# Altium PCB DRIVER.PcbDoc
Units mm, origin at the board's own origin, x right, y up, seen from the top; angles counter-clockwise.
Board outline 50 x 50 mm, 2 copper layers (Top Layer, Bottom Layer); 85 components, 68 nets, 234 pads, 32 vias.
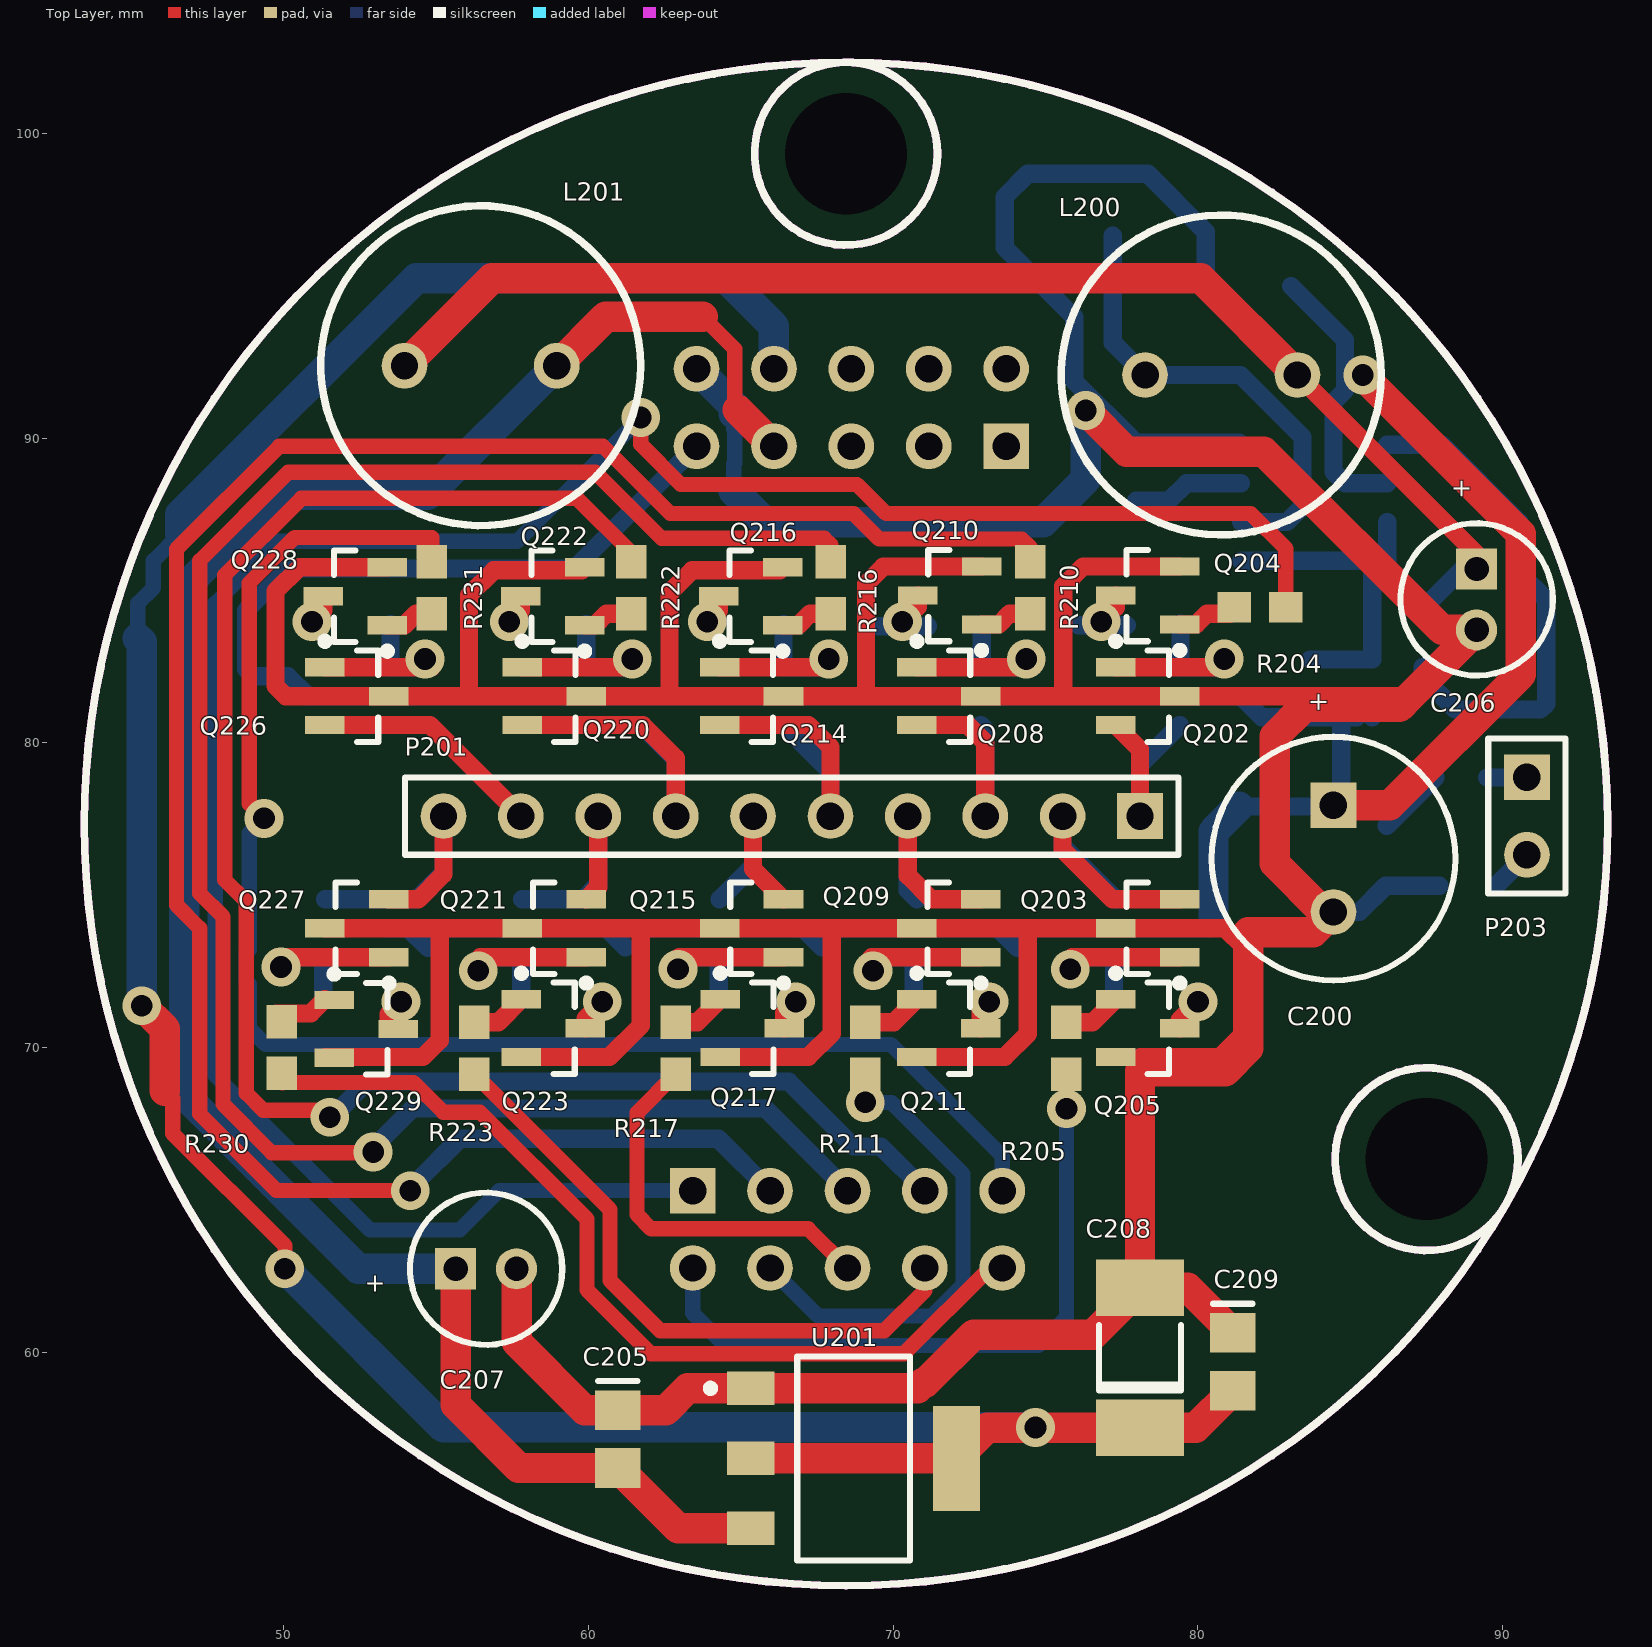
[diagram p0: Top Layer view]
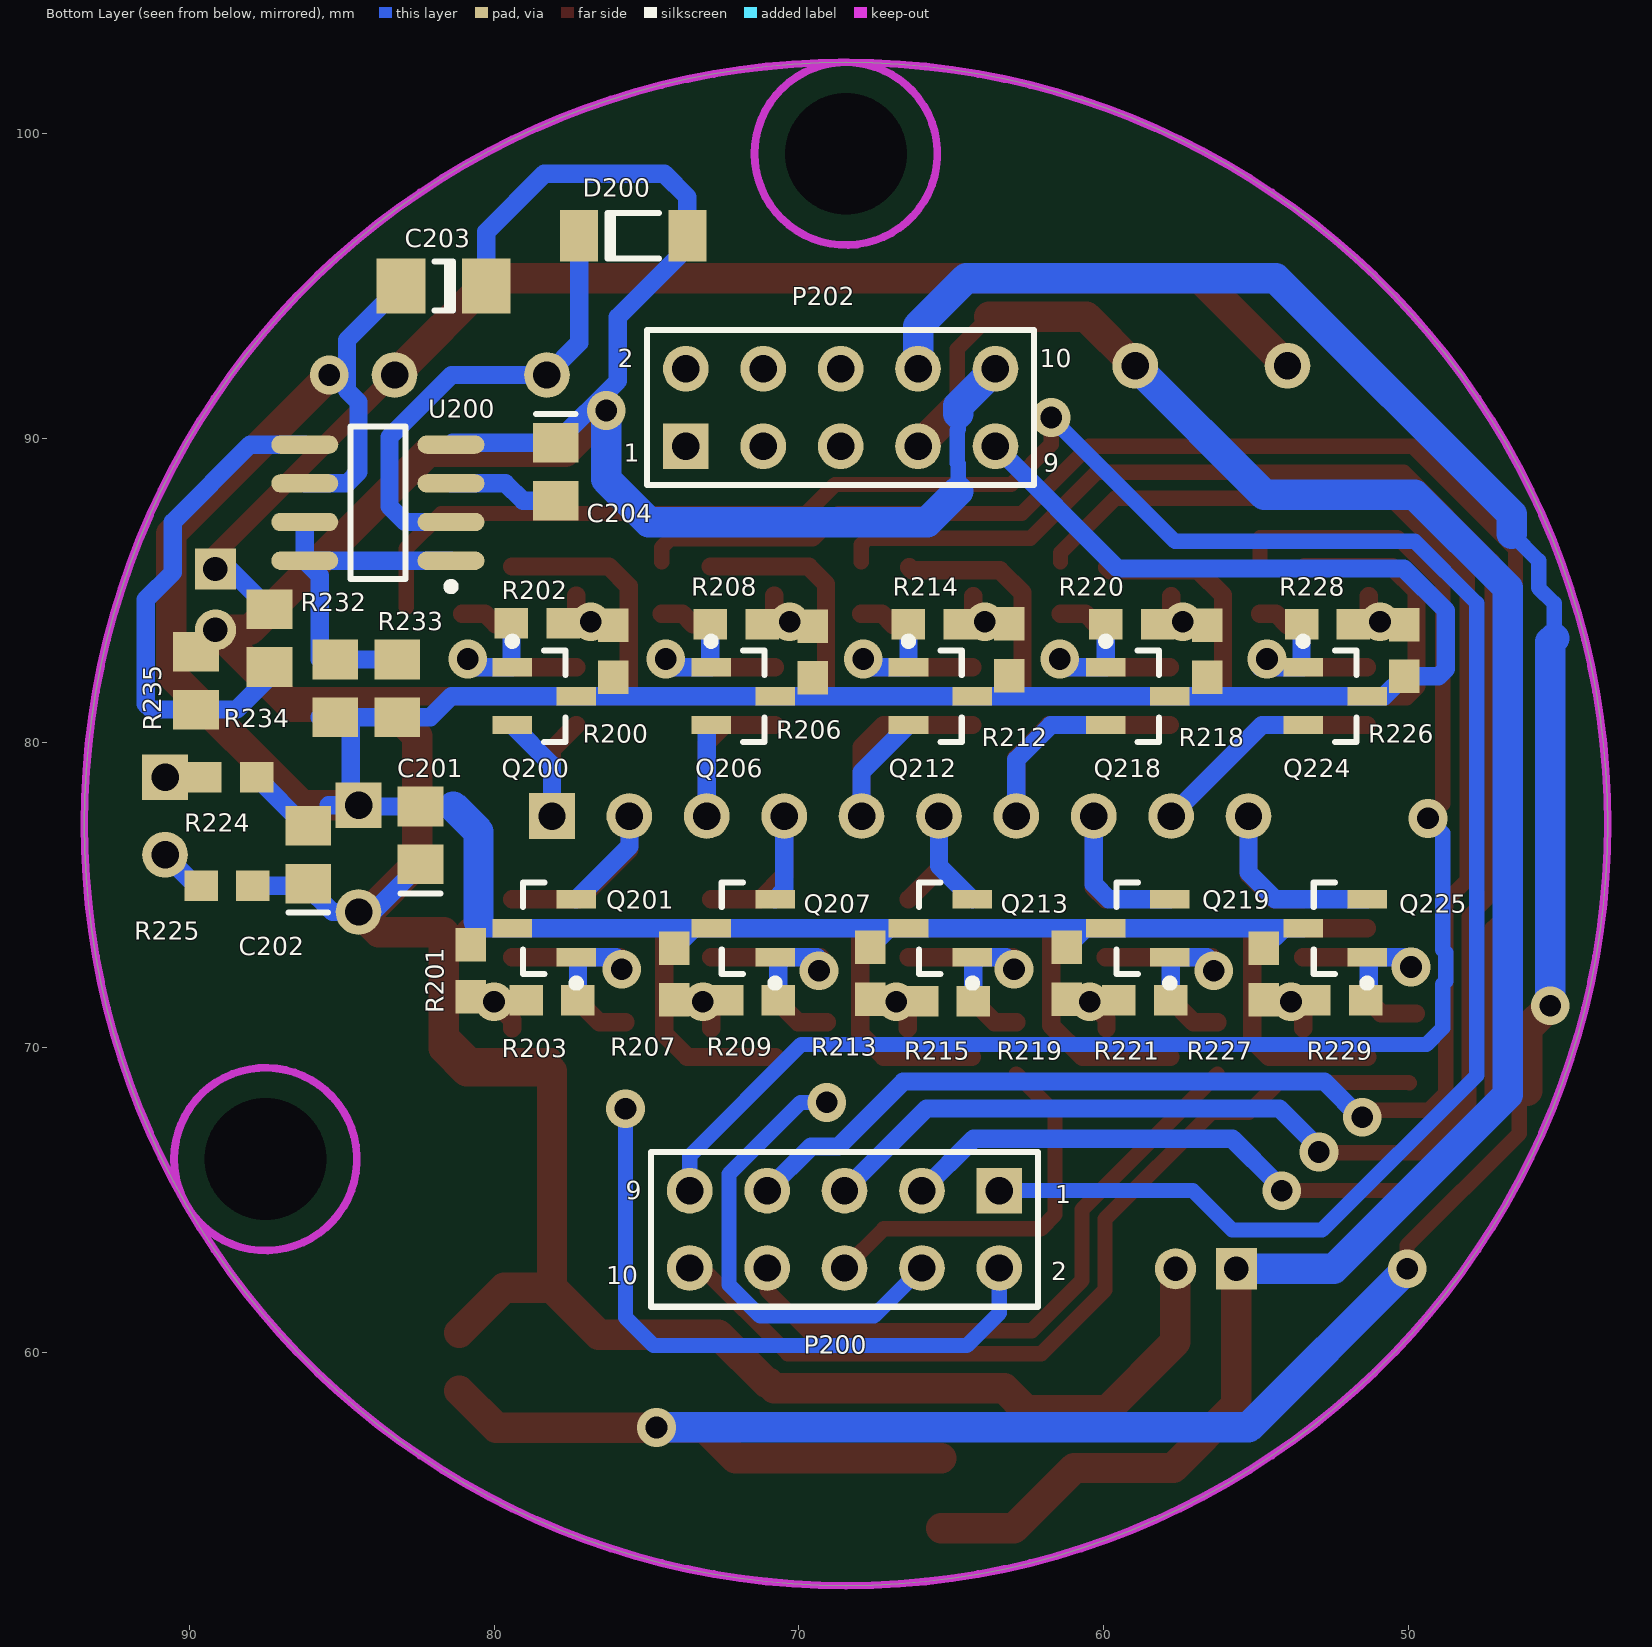
[diagram p1: Bottom Layer view, seen from below]

## Layer stack, top to bottom
Top Solder: solder mask 0.0102, Solder Resist, Dk 3.5
Top Layer: signal copper 0.0356
Dielectric 1: dielectric 0.32, FR-4, Dk 4.8
Bottom Layer: signal copper 0.0356
Bottom Solder: solder mask 0.0102, Solder Resist, Dk 3.5

## Board outline
68.456,52.337 cw(c68.456,77.337) 43.456,77.337 cw(c68.456,77.337) 68.456,102.337 cw(c68.456,77.337) 93.456,77.337 cw(c68.456,77.337)

## Design rules (kind name [scope] priority, off if disabled: settings)
Clearance [All] p1: gap=0.254 ignorepadtopadclearanceinfootprint=FALSE except(0: Arc-Hole Track-Hole SMDPad-Hole THPad-Hole Via-Hole Fill-Hole Poly-Hole Region-Hole Text-Hole)
PolygonConnect [All] p1: connectstyle=Relief reliefconductorwidth=0.254 reliefentries=4 polygonreliefangle="90 Angle" airgapwidth=0.254
RoutingVias [All] p1: holewidth=0.711 width=1.27 viastyle="Through Hole" minholewidth=0.711 minwidth=1.27 maxholewidth=0.711 maxwidth=1.27
SolderMaskExpansion [All] p1: expansion=0.102
Width [All] p1: maxlimit=2.54 minlimit=0.254 preferedwidth=0.6
30 further rules are at their usual default settings.

## Components (designator, comment, footprint, x,y, rotation, side; value= is the part's Value field where it differs from the comment)
C200 "220uF" E 84.455,76.2 r270 top
C201 "" 0805 82.423,76.962 r90 bottom
C202 "" 0805 86.106,76.327 r90 bottom
C203 "" 1206 81.661,94.996 r0 bottom
C204 "" 0805 77.978,88.9 r270 bottom
C205 "" 0805 60.96,57.15 r270 top
C206 "220uF" CAPPR2-5X11 89.154,84.709 r270 top
C207 "220uF" CAPPR2-5X11 56.642,62.738 r0 top
C208 "10uF" 49BC-C 78.105,59.817 r90 top
C209 "" 0805 81.153,59.69 r270 top
D200 "BAV102" SOD80C 75.438,96.647 r0 bottom
L200 "" RB5-10.5 80.772,92.075 r0 top
L201 "" RB5-10.5 56.464,92.38 r0 top
P200 "Header 5X2" HDR2X5 63.424,65.303 r0 bottom locked
P201 "Header 10" HDR1X10 78.105,77.597 r180 top
P202 "Header 5X2" HDR2X5 73.711,89.738 r180 bottom locked
P203 "ALIGN" HDR1X2 90.805,78.867 r270 top
Q200 "MMBT4401" SOT23_N 78.359,81.534 r180 bottom
Q201 "MMBT4401" SOT23_N 78.359,73.914 r0 bottom
Q202 "MMBT2907" SOT23_N 78.359,81.534 r0 top
Q203 "MMBT2907" SOT23_N 78.359,73.914 r180 top
Q204 "MMBT4401" SOT23_N 78.359,84.836 r180 top
Q205 "MMBT4401" SOT23_N 78.359,70.637 r0 top
Q206 "MMBT4401" SOT23_N 71.833,81.534 r180 bottom
Q207 "MMBT4401" SOT23_N 71.833,73.914 r0 bottom
Q208 "MMBT2907" SOT23_N 71.833,81.534 r0 top
Q209 "MMBT2907" SOT23_N 71.833,73.914 r180 top
Q210 "MMBT4401" SOT23_N 71.857,84.836 r180 top
Q211 "MMBT4401" SOT23_N 71.831,70.637 r0 top
Q212 "MMBT4401" SOT23_N 65.356,81.534 r180 bottom
Q213 "MMBT4401" SOT23_N 65.356,73.914 r0 bottom
Q214 "MMBT2907" SOT23_N 65.356,81.534 r0 top
Q215 "MMBT2907" SOT23_N 65.356,73.914 r180 top
Q216 "MMBT4401" SOT23_N 65.329,84.811 r180 top
Q217 "MMBT4401" SOT23_N 65.38,70.637 r0 top
Q218 "MMBT4401" SOT23_N 58.879,81.534 r180 bottom
Q219 "MMBT4401" SOT23_N 58.879,73.914 r0 bottom
Q220 "MMBT2907" SOT23_N 58.879,81.534 r0 top
Q221 "MMBT2907" SOT23_N 58.879,73.914 r180 top
Q222 "MMBT4401" SOT23_N 58.826,84.811 r180 top
Q223 "MMBT4401" SOT23_N 58.852,70.637 r0 top
Q224 "MMBT4401" SOT23_N 52.402,81.534 r180 bottom
Q225 "MMBT4401" SOT23_N 52.402,73.914 r0 bottom
Q226 "MMBT2907" SOT23_N 52.402,81.534 r0 top
Q227 "MMBT2907" SOT23_N 52.402,73.914 r180 top
Q228 "MMBT4401" SOT23_N 52.349,84.811 r180 top
Q229 "MMBT4401" SOT23_N 52.705,70.612 r0 top
R200 "10K" ERA-0603 76.098,83.007 r90 bottom
R201 "10K" ERA-0603 80.772,72.517 r270 bottom
R202 "1K" ERA-0603 78.588,83.922 r180 bottom
R203 "1K" ERA-0603 78.105,71.552 r0 bottom
R204 "10K" ERA-0603 82.042,84.455 r0 top
R205 "10K" ERA-0603 75.692,69.977 r270 top
R206 "10K" ERA-0603 69.545,82.982 r90 bottom
R207 "10K" ERA-0603 74.092,72.415 r270 bottom
R208 "1K" ERA-0603 72.06,83.896 r180 bottom
R209 "1K" ERA-0603 71.526,71.552 r0 bottom
R210 "10K" ERA-0603 74.505,85.09 r90 top
R211 "10K" ERA-0603 69.088,69.977 r270 top
R212 "10K" ERA-0603 63.094,83.058 r90 bottom
R213 "10K" ERA-0603 67.666,72.441 r270 bottom
R214 "1K" ERA-0603 65.557,83.896 r180 bottom
R215 "1K" ERA-0603 65.126,71.526 r0 bottom
R216 "10K" ERA-0603 67.958,85.09 r90 top
R217 "10K" ERA-0603 62.865,69.977 r270 top
R218 "10K" ERA-0603 56.591,83.007 r90 bottom
R219 "10K" ERA-0603 61.214,72.441 r270 bottom
R220 "1K" ERA-0603 59.08,83.896 r180 bottom
R221 "1K" ERA-0603 58.649,71.552 r0 bottom
R222 "10K" ERA-0603 61.411,85.09 r90 top
R223 "10K" ERA-0603 56.261,69.977 r270 top
R224 "1R" ERA-0603 88.646,78.867 r0 bottom
R225 "1R" ERA-0603 88.773,75.311 r0 bottom
R226 "10K" ERA-0603 50.14,83.033 r90 bottom
R227 "10K" ERA-0603 54.737,72.415 r270 bottom
R228 "1K" ERA-0603 52.654,83.896 r180 bottom
R229 "1K" ERA-0603 52.248,71.552 r0 bottom
R230 "10K" ERA-0603 49.936,70.002 r270 top
R231 "10K" ERA-0603 54.864,85.09 r90 top
R232 "1R" ERA-0805 85.217,81.788 r90 bottom
R233 "1R" ERA-0805 83.185,81.788 r90 bottom
R234 "3K6" ERA-0805 87.376,83.439 r90 bottom
R235 "1k2" ERA-0805 89.789,82.042 r270 bottom
U200 "MC34063AD" 751-05_N 83.82,87.884 r0 bottom
U201 "REG1117-3.3" ZZ311 68.707,56.515 r270 top

## Footprints (in the part's own frame and the unit in brackets; to place one, negate y for a bottom-side part, rotate by r counter-clockwise, add the part's x,y. Pads: shape width x height; smd on the part's side, far side on the other; paste and mask are expansions set on the pad)
49BC-C [mm] "Chip Capacitor; Body 5.08 x 2.54 mm (LxW typ)"
  rect 1.85x2.9 smd: 1(-2.3,0) 2(2.3,0)
  silkscreen extent -1.08,-1.35 1.07,1.35
751-05_N [mm] "SOIC, 8-Leads, Body 4.9x3.9mm, Pitch 1.27mm, IPC Medium Density"
  oval 2.2x0.6 smd: 1(-2.4,1.905) 2(-2.4,0.635) 3(-2.4,-0.635) 4(-2.4,-1.905) 5(2.4,-1.905) 6(2.4,-0.635) 7(2.4,0.635) 8(2.4,1.905)
  silkscreen extent -2.52,-2.5 0.9,2.88, body extent -1.95,-2.45 1.95,2.45, height 1.75
0805 [mm] "Chip Capacitor; Body 2.0 x 1.2 mm (LxW typ)"
  rect 1.3x1.5 smd: 1(-0.95,0) 2(0.95,0)
  silkscreen extent -1.9,-0.65 -1.9,0.65
1206 [mm] "Chip Capacitor; Body 3.2 x 1.6 mm (LxW typ)"
  rect 1.6x1.8 smd: 1(-1.4,0) 2(1.4,0)
  silkscreen extent -0.3,-0.8 0.3,0.8
CAPPR2-5X11 [mm] "Capacitor, Electrolytic, Radial; Body 5 x 11 mm (Dia.xH typ); Pin Spacing 2 mm (typ)"
  rect 1.35x1.35 hole 0.8: 1(-1,0)
  round 1.35 hole 0.8: 2(1,0)
  silkscreen extent -2.5,-2.5 2.5,2.5
E [mm] "Capacitor, Electrolytic, Radial; Body 8 x 10.5 mm (Dia.xH typ); Pin Spacing 3.5 mm (typ)"
  rect 1.5x1.5 hole 0.9: 1(-1.75,0)
  round 1.5 hole 0.9: 2(1.75,0)
  silkscreen extent -4,-4 4,4
ERA-0603 [mm] "Chip Resistor; Body 1.6 x 0.8 mm (LxW typ)"
  rect 1.1x1 smd: 1(-0.85,0) 2(0.85,0)
ERA-0805 [mm] "Chip Resistor; Body 2 x 1.3 mm (LxW typ)"
  rect 1.3x1.5 smd: 1(-0.95,0) 2(0.95,0)
HDR1X2 [mm] "Connector; Header; 2 Position"
  rect 1.5x1.5 hole 0.9: 1(0,0)
  round 1.5 hole 0.9: 2(2.54,0)
  silkscreen extent -1.27,-1.27 3.81,1.27
HDR1X10 [mm] "Connector; Header; 10 Position"
  rect 1.5x1.5 hole 0.9: 1(0,0)
  round 1.5 hole 0.9: 2(2.54,0) 3(5.08,0) 4(7.62,0) 5(10.16,0) 6(12.7,0) 7(15.24,0) 8(17.78,0) 9(20.32,0) 10(22.86,0)
  silkscreen extent -1.27,-1.27 24.13,1.27
HDR2X5 [mm] "Connector; Header; 5x2 Position"
  rect 1.5x1.5 hole 0.9: 1(0,0)
  round 1.5 hole 0.9: 2(0,2.54) 3(2.54,0) 4(2.54,2.54) 5(5.08,0) 6(5.08,2.54) 7(7.62,0) 8(7.62,2.54) 9(10.16,0) 10(10.16,2.54)
  silkscreen extent -1.27,-1.27 11.43,3.81
RB5-10.5 [mm] "Capacitor (Radial); 2 Leads"
  round 1.5 hole 0.9: 1(-2.5,0) 2(2.5,0)
  silkscreen extent -5.25,-5.25 5.25,5.25
SOD80C [mm] "Metal Electrode Face (MELF) Diode; Body 3.5 x 1.6 mm (LxDia)"
  rect 1.25x1.7 smd: 1(-1.775,0) 2(1.775,0)
  silkscreen extent -0.85,-0.75 0.85,0.75
SOT23_N [mm] "SOT23, 3-Leads, Body 2.9x1.3mm, Pitch 0.95mm, Lead Span 2.3mm, IPC Medium Density"
  rect 1.3x0.6 smd: 1(-1.05,0.95) 2(-1.05,-0.95) 3(1.05,0)
  silkscreen extent -1.18,-1.5 0.7,1.92, body extent -0.7,-1.5 0.7,1.5, height 1.1
ZZ311 [mm] "SOT-223/SC-73; 4 Leads; Body 6.7 x 7.3 mm, inc. leads (LxW max)"
  rect 1.1x1.55 smd: 1(-2.3,-3.375) 2(0,-3.375) 3(2.3,-3.375)
  rect 3.45x1.55 smd: 4(0,3.375)
  silkscreen extent -3.35,-4.82 3.35,1.85

## Part data
C200: library part 94SS107X0020EBP, "Solid Aluminum Capacitor with Organic Semiconductor Electrolyte: 100uF, 20V, Bulk Pack"
C201 C202 C204 C205 C209: library part C0805, "Ceramic Chip Capacitor - Standard"
C203: library part C1206, "Ceramic Chip Capacitor - Standard"
C206 C207: library part EKA00AA322C00, "Aluminum Electrolytic Capacitor, Radial Style with Long Leads: 220uF, 10V"
C208: library part 49BC685B010M, "Conformal Coated Solid Tantalum Chip Capacitor: 6.8uF, 20% Tolerance, 10 WVDC @ -55°C to +85°C, Surge = 13V"
D200: "General-purpose Diode"
L200 L201: library part PCMC063T-R82MN, "SMT Power Choke Coil; Size 7.3×6.6×3.0mm, ±20% Tolerance, 0.82uH, 13A"
P200 P202: "Header, 5-Pin, Dual row"
P201: "Header, 10-Pin"
P203: library part "Header 2", "Header, 2-Pin"
Q200 Q201 Q204 Q205 Q206 Q207 Q210 Q211 Q212 Q213 Q216 Q217 Q218 Q219 Q222 Q223 Q224 Q225 Q228 Q229: library part BC817-16, "NPN General-purpose Transistor"
Q202 Q203 Q208 Q209 Q214 Q215 Q220 Q221 Q226 Q227: library part BC807-16, "PNP General-purpose Transistor"
R200 R201 R202 R203 R204 R205 R206 R207 R208 R209 R210 R211 R212 R213 R214 R215 R216 R217 R218 R219 R220 R221 R222 R223 R224 R225 R226 R227 R228 R229 R230 R231: library part ERAV, "Metal Film Thermosensitive Chip Resistor, 0.56 Ohm to 10k Ohm Range, 5% Tolerance, 0603 Size, 0.063 W"
R232 R233 R234 R235: library part ERAS, "Metal Film Thermosensitive Chip Resistor, 0.56 Ohm to 10k Ohm Range, 5% Tolerance, 0805 Size, 0.1 W"
U200: "DC-to-DC Converter Control Circuit"
U201: "800mA and 1A Low Dropout Positive Regulator 2.85V, 3.3V, 5V, and Adjustable"

## Free pads (board coordinates)
  round 1.524 hole 4: rupa(68.456,99.337) rupa(87.509,66.337)

## Via types
v1: diameter 1.27, hole 0.711, Top Layer to Bottom Layer, 32 vias

## Nets (pads, with @x,y where several pads share a name; then routed paths per layer and width w, separated by ;. In a path a pad name is that pad's centre, name@x,y a point inside that pad or via, vN(x,y) a via of type N, cw(c..) or ccw(c..) an arc to the next point about the centre after c; other vN are vias at no path point)
+3V3_DR: C208.1 C209.2 P202.8 U201.2 U201.4 | length 95.6
  Top Layer w0.5: 46.101,68.58 46.355,68.326 46.355,67.183 50.038,63.5 v1(50.038,62.738)
  Top Layer w1: v1(45.339,71.374) 46.101,70.612 46.101,68.58 ; U201.2 U201.4 73.084,57.517 C208.1 79.93,57.517 C209.2
  Bottom Layer w0.5: 45.212,83.439 45.212,84.582 45.72,85.09 45.72,85.979 46.609,86.868
  Bottom Layer w1: 45.212,83.439 45.339,83.312 v1(45.339,71.374) ; 46.609,86.868 46.609,87.503 54.356,95.25 64.516,95.25 66.091,93.675 P202.8 ; v1(50.038,62.738) 55.245,57.531 v1(74.676,57.531)
+5V_DR: C205.2 C207.1 L201.2 P202.7 U201.3 | length 69.7
  Top Layer w0.5: 63.754,93.98 64.805,92.929 64.805,91.024 64.897,90.932
  Top Layer w1: C207.1 55.642,58.277 57.719,56.2 C205.2 62.945,54.215 U201.3 ; L201.2 60.564,93.98 63.754,93.98 ; 64.897,90.932 P202.7
  Bottom Layer w1: C207.1 52.451,62.738 46.736,68.453 46.736,85.09 49.784,88.138 54.722,88.138 L201.2
+24V_DR: C200.1 C201.2 C202.2 C203.2 P202.9 Q200.3 Q201.3 Q206.3 Q207.3 Q212.3 Q213.3 Q218.3 Q219.3 Q224.3 Q225.3 R200.1 R201.1 R206.1 R207.1 R212.1 R213.1 R218.1 R219.1 R224.1 R226.1 R227.1 R232.1 R233.1 U200.6 | length 130.6
  Top Layer w1: C200.1 86.307,77.95 90.602,82.245 90.602,86.868 85.42,92.05 v1(85.42,92.075)
  Bottom Layer w0.6: Q225.3 Q225.3@54.088,73.914 ; R227.1 Q225.3@54.088,73.914 ; Q219.3 60.591,73.914 R219.1 ; P202.9 59.538,85.725 50.149,85.725 48.768,84.344 48.768,82.423 49.008,82.183 R226.1 50.788,81.534 Q224.3 Q218.3 Q212.3 Q206.3 Q200.3 81.407,81.534 82.103,80.838 R233.1 R232.1@84.709,80.838 ; R213.1 Q213.3@67.042,73.914 ; Q207.3 73.443,73.914 R207.1 ; R201.1@80.391,73.914 Q201.3 Q213.3@67.042,73.914 ; 81.341,77.912 C201.2 84.417,77.912 C200.1 ; C203.2 84.836,93.221 84.836,91.567 84.455,91.186 84.455,88.9 84.836,88.519 U200.6 ; R232.1 R232.1@84.709,80.838 ; R232.1@85.217,81.026 85.537,81.026 R232.1@85.725,80.838 ; 85.433,77.95 C200.1 ; C202.2@86.206,77.277 R224.1 ; Q225.3@54.088,73.914 Q213.3 Q213.3@67.042,73.914 ; C200.1 84.709,78.204 R232.1@84.709,80.838
  Bottom Layer w1: 80.518,74.168 80.518,77.089 81.341,77.912
A_DR: P202.1
B_DR: P202.3
DR_ENC_1: P200.1 R204.2 | length 75.7
  Top Layer w0.5: v1(61.722,90.678) 61.722,89.794 63.031,88.484 68.818,88.484 69.773,87.528 81.737,87.528 82.892,86.374 R204.2
  Bottom Layer w0.5: v1(61.722,90.678) 57.658,86.614 49.784,86.614 47.752,84.582 47.752,69.088 52.832,64.008 55.778,64.008 57.074,65.303 P200.1
DR_ENC_2: P200.2 R205.2 | length 21.8
  Top Layer w0.5: P200.2@63.424,62.433 P200.2
  Bottom Layer w0.5: P200.2 63.424,61.29 64.491,60.223 74.778,60.223 75.692,61.138 v1(75.692,67.996)
DR_ENC_4: P200.3 R210.2 | length 71
  Top Layer w0.5: v1(54.153,65.303) 49.759,65.303 47.244,67.818 47.244,73.914 46.482,74.676 46.482,86.36 49.857,89.735 60.481,89.735 62.687,87.528 68.707,87.528 69.545,86.69 74.225,86.69 74.505,86.411 R210.2
  Bottom Layer w0.6: v1@54.331,65.557 55.778,67.005 64.262,67.005 P200.3
DR_ENC_8: P200.4 R211.2 | length 15.2
  Bottom Layer w0.5: P200.4 67.539,61.189 71.272,61.189 72.298,62.214 72.298,65.853 69.952,68.199 v1(69.088,68.199)
DR_ENC_10: P200.5 R216.2 | length 65
  Top Layer w0.5: v1@53.111,66.319 52.883,66.548 49.606,66.548 48.006,68.148 48.006,74.295 47.244,75.057 47.244,85.979 50.146,88.881 60.233,88.881 62.398,86.716 67.742,86.716 67.958,86.5 R216.2
  Bottom Layer w0.6: v1@53.111,66.319 53.111,66.878 54.229,67.996 65.811,67.996 P200.5
  other v1: 52.934,66.573
DR_ENC_20: P200.6 R217.2 | length 12.8
  Top Layer w0.5: R217.2 61.595,67.857 61.595,64.516 62.062,64.049 67.218,64.049 P200.6
DR_ENC_40: P200.7 R222.2 | length 57.2
  Top Layer w0.5: v1@51.384,67.945 49.327,67.945 48.772,68.5 48.772,74.799 48.066,75.505 48.066,85.514 50.579,88.027 59.623,88.027 61.411,86.239 R222.2
  Bottom Layer w0.6: v1(51.511,67.716) 51.511,67.64 52.756,68.885 66.573,68.885 68.707,66.751 69.596,66.751 P200.7
DR_ENC_80: P200.8 R223.2 | length 20.9
  Top Layer w0.5: R223.2 60.706,64.682 60.706,62.357 62.357,60.706 69.723,60.706 71.044,62.027 P200.8
DR_ENC_100: P200.9 R231.2 | length 50.1
  Top Layer w0.5: v1(49.352,77.521) 48.87,78.003 48.87,85.251 50.359,86.741 54.864,86.741 R231.2
  Bottom Layer w0.5: v1(49.352,77.521) 48.87,77.038 48.87,73.213 48.772,73.116 48.772,72.172 48.87,72.075 48.87,70.637 49.403,70.104 69.926,70.104 73.584,66.446 P200.9
DR_ENC_200: P200.10 R230.2 | length 29.8
  Top Layer w0.5: R230.2@49.962,68.834 49.983,68.855 54.258,68.855 55.238,67.876 56.446,67.876 59.952,64.37 59.952,62.045 62.045,59.952 70.366,59.952 73.177,62.763 P200.10
ENC_OUT_1: P201.1 Q200.2 Q202.2 | length 6.8
  Top Layer w0.6: Q202.2 78.105,79.788 P201.1
  Bottom Layer w0.6: P201.1 78.105,79.28 Q200.2
ENC_OUT_2: P201.2 Q201.2 Q203.2 | length 9.1
  Top Layer w0.6: P201.2 75.565,76.505 77.206,74.864 Q203.2
  Bottom Layer w0.6: P201.2 75.565,76.608 Q201.2
ENC_OUT_4: P201.3 Q206.2 Q208.2 | length 7.9
  Top Layer w0.6: Q208.2 72.451,80.584 73.025,80.01 P201.3
  Bottom Layer w0.6: Q206.2 73.025,80.442 P201.3
ENC_OUT_8: P201.4 Q207.2 Q209.2 | length 7.5
  Top Layer w0.6: P201.4 70.485,75.641 71.262,74.864 Q209.2
  Bottom Layer w0.6: P201.4 70.485,75.162 Q207.2
ENC_OUT_10: P201.5 Q212.2 Q214.2 | length 9.8
  Top Layer w0.6: Q214.2 67.219,80.584 67.945,79.858 P201.5
  Bottom Layer w0.6: Q212.2 67.945,79.045 P201.5
ENC_OUT_20: P201.6 Q213.2 Q215.2 | length 6.3
  Top Layer w0.6: P201.6 65.405,75.865 Q215.2
  Bottom Layer w0.6: Q213.2 65.405,75.963 P201.6
ENC_OUT_40: P201.7 Q218.2 Q220.2 | length 12.6
  Top Layer w0.6: Q220.2 61.783,80.584 62.865,79.502 P201.7
  Bottom Layer w0.6: Q218.2 61.732,80.584 62.865,79.451 P201.7
ENC_OUT_80: P201.8 Q219.2 Q221.2 | length 7.8
  Top Layer w0.6: Q221.2 60.325,75.26 P201.8
  Bottom Layer w0.6: Q219.2 59.827,74.864 60.325,75.362 P201.8
ENC_OUT_100: P201.9 Q224.2 Q226.2 | length 13.2
  Top Layer w0.6: Q226.2 54.798,80.584 P201.9
  Bottom Layer w0.6: Q224.2 54.798,80.584 P201.9
ENC_OUT_200: P201.10 Q225.2 Q227.2 | length 10.2
  Top Layer w0.6: Q227.2 54.417,74.864 55.245,75.692 P201.10
  Bottom Layer w0.6: Q225.2 54.366,74.864 55.245,75.743 P201.10
NetC204_2: C204.2 U200.3 | length 3.7
  Bottom Layer w0.6: C204.2 79.06,87.95 79.629,88.519 U200.3
NetC206_1: C206.1 L200.2 L201.1 R234.2 | length 42.9
  Top Layer w0.6: L200.2 89.154,86.193 C206.1
  Top Layer w1: L201.1 56.834,95.25 80.097,95.25 L200.2
  Bottom Layer w0.6: R234.2 88.696,85.709 C206.1
NetD200_2: D200.2 L200.1 U200.2 | length 15.5
  Bottom Layer w0.6: D200.2 77.213,93.134 L200.1 81.407,92.075 83.439,90.043 83.439,87.757 82.931,87.249 U200.2
NetP203_1: P203.1 R224.2 | length 1.3
  Bottom Layer w0.6: R224.2 P203.1
NetP203_2: P203.2 R225.2 | length 1.4
  Bottom Layer w0.6: R225.2@89.789,75.311 P203.2
NetQ200_1: Q200.1 Q202.1 R202.1 | length 6.4
  Top Layer w0.6: Q202.1 v1@80.838,82.484
  Bottom Layer w0.6: Q200.1 v1@80.838,82.484 ; Q200.1@79.438,82.513 R202.1
  other v1: 80.874,82.753
NetQ201_1: Q201.1 Q203.1 R203.1 | length 6.2
  Top Layer w0.6: v1@75.88,72.964 Q203.1
  Bottom Layer w0.6: v1@76.012,72.964 Q201.1 ; R203.1 Q201.1@77.255,72.91
  other v1: 75.819,72.568
NetQ204_1: Q204.1 R204.1 | length 1.8
  Top Layer w0.6: Q204.1 79.949,83.886 80.303,84.24 R204.1@81.051,84.24
NetQ204_3: Q204.3 R200.2 R202.2 | length 2
  Top Layer w0.6: 77.309,84.446 Q204.3
  Bottom Layer w0.6: R200.2 R202.2@77.673,83.857
  other v1: 76.835,83.972
NetQ205_1: Q205.1 R205.1 | length 1.9
  Top Layer w0.6: R205.1 76.549,70.827 Q205.1
NetQ205_3: Q205.3 R201.2 R203.2 | length 1.1
  Top Layer w0.6: Q205.3 79.409,70.9 v1(80.01,71.501)
NetQ206_1: Q206.1 Q208.1 R208.1 | length 6.4
  Top Layer w0.6: Q208.1 v1@74.336,82.484
  Bottom Layer w0.6: Q206.1 v1@74.336,82.484 ; Q206.1@72.91,82.511 R208.1
  other v1: 74.371,82.753
NetQ207_1: Q207.1 Q209.1 R209.1 | length 6.3
  Top Layer w0.6: v1@69.301,72.964 Q209.1
  Bottom Layer w0.6: v1@69.408,72.964 Q207.1 ; R209.1 Q207.1@70.676,72.858
  other v1: 69.342,72.517
NetQ210_1: Q210.1 R210.1 | length 1.7
  Top Layer w0.6: Q210.1 73.472,83.886 73.826,84.24 R210.1
NetQ210_3: Q210.3 R206.2 R208.2 | length 2
  Top Layer w0.6: 70.807,84.472 Q210.3
  Bottom Layer w0.6: R206.2 R208.2@71.145,83.832
  other v1: 70.307,83.972
NetQ211_1: Q211.1 R211.1 | length 2
  Top Layer w0.6: R211.1 70.021,70.827 Q211.1
NetQ211_3: Q211.3 R207.2 R209.2 | length 1
  Top Layer w0.6: Q211.3 72.881,71.23 v1(73.152,71.501)
NetQ212_1: Q212.1 Q214.1 R214.1 | length 6.4
  Top Layer w0.6: Q214.1 v1@67.859,82.484
  Bottom Layer w0.6: Q212.1 v1@67.859,82.484 ; Q212.1@66.407,82.486 R214.1
  other v1: 67.894,82.753
NetQ213_1: Q213.1 Q215.1 R215.1 | length 5.9
  Top Layer w0.6: v1@62.977,72.964 Q215.1
  Bottom Layer w0.6: v1@63.21,72.964 Q213.1 ; R215.1 Q213.1@64.276,72.934
  other v1: 62.941,72.568
NetQ216_1: Q216.1 R216.1 | length 1.7
  Top Layer w0.6: Q216.1 66.893,83.861 67.273,84.24 R216.1
NetQ216_3: Q216.3 R212.2 R214.2 | length 0.5
  Top Layer w0.6: v1@64.279,84.345 Q216.3
  other v1: 63.906,83.972
NetQ217_1: Q217.1 R217.1 | length 1.8
  Top Layer w0.6: R217.1 63.569,70.827 Q217.1
NetQ217_3: Q217.3 R213.2 R215.2 | length 1
  Top Layer w0.6: Q217.3 66.43,71.129 v1(66.802,71.501)
NetQ218_1: Q218.1 Q220.1 R220.1 | length 6.5
  Top Layer w0.6: Q220.1 v1@61.407,82.484
  Bottom Layer w0.6: Q218.1 v1@61.407,82.484 ; Q218.1@59.93,82.486 R220.1
  other v1: 61.443,82.753
NetQ219_1: Q219.1 Q221.1 R221.1 | length 6.1
  Top Layer w0.6: v1@56.449,72.964 Q221.1
  Bottom Layer w0.6: v1@56.606,72.964 Q219.1 ; R221.1 Q219.1@57.799,72.934
  other v1: 56.388,72.517
NetQ222_1: Q222.1 R222.1 | length 1.7
  Top Layer w0.6: Q222.1 60.213,83.861 60.593,84.24 R222.1
NetQ222_3: Q222.3 R218.2 R220.2 | length 0.5
  Top Layer w0.6: v1@57.776,84.345 Q222.3
  other v1: 57.404,83.972
NetQ223_1: Q223.1 R223.1 | length 1.9
  Top Layer w0.6: R223.1 57.041,70.827 Q223.1
NetQ223_3: Q223.3 R219.2 R221.2 | length 1.1
  Top Layer w0.6: Q223.3 59.902,70.951 v1(60.452,71.501)
NetQ224_1: Q224.1 Q226.1 R228.1 | length 6.3
  Top Layer w0.6: Q226.1 v1@54.854,82.484
  Bottom Layer w0.6: Q224.1 v1@54.854,82.484 ; Q224.1@53.504,82.537 R228.1
  other v1: 54.635,82.753
NetQ225_1: Q225.1 Q227.1 R229.1 | length 6.6
  Top Layer w0.6: v1@49.794,72.964 Q227.1
  Bottom Layer w0.6: v1@49.794,72.964 Q225.1 ; R229.1@51.296,71.552 Q225.1@51.296,72.909
  other v1: 49.911,72.644
NetQ228_1: Q228.1 R231.1 | length 1.6
  Top Layer w0.6: Q228.1 53.965,83.861 54.344,84.24 R231.1
NetQ228_3: Q228.3 R226.2 R228.2 | length 1
  Top Layer w0.6: v1(50.927,83.972) 51.299,84.345 Q228.3
NetQ229_1: Q229.1 R230.1 | length 1.8
  Top Layer w0.6: R230.1@49.745,71.12 50.883,71.12 Q229.1@51.35,71.587
NetQ229_3: Q229.3 R227.2 R229.2 | length 1
  Top Layer w0.6: Q229.3@53.45,70.637 53.45,71.103 v1(53.848,71.501)
NetR103_1: 
NetR232_2: R232.2 R233.2 U200.1 U200.7 U200.8 | length 11.5
  Bottom Layer w0.6: U200.1 U200.8 ; R233.2@83.693,82.738 85.725,82.738 85.725,85.484 U200.8 ; U200.7 U200.8
NetR234_1: R234.1 R235.2 U200.5 | length 16.6
  Bottom Layer w0.6: U200.5 88.011,89.789 90.551,87.249 90.551,85.598 91.44,84.709 91.44,81.28 91.252,81.092 R235.2 88.453,81.092 87.376,82.169 R234.1
RS422_RX_DR: P202.5
RS422_TX_DR: P202.6
VSS_DR: C200.2 C201.1 C202.1 C203.1 C204.1 C205.1 C206.2 C207.2 C208.2 C209.1 D200.1 P202.10 Q202.3 Q203.3 Q204.2 Q205.2 Q208.3 Q209.3 Q210.2 Q211.2 Q214.3 Q215.3 Q216.2 Q217.2 Q220.3 Q221.3 Q222.2 Q223.2 Q226.3 Q227.3 Q228.2 Q229.2 R225.1 R235.1 U200.4 U201.1 | length 268
  Top Layer w0.6: Q229.2@51.35,69.687 54.574,69.687 55.118,70.231 55.118,73.914 ; Q227.3 55.118,73.914 ; Q228.2 50.516,85.761 49.733,84.978 49.733,81.864 50.063,81.534 Q226.3 Q220.3 62.662,81.534 ; 56.083,81.534 56.083,84.851 56.897,85.665 59.78,85.665 Q222.2 ; Q223.2 60.685,69.687 61.722,70.724 61.722,73.914 ; Q217.2 67.213,69.687 67.991,70.465 67.991,73.787 ; Q216.2 66.283,85.665 63.399,85.665 62.662,84.927 62.662,81.534 ; Q211.2 73.665,69.687 74.422,70.445 74.422,73.787 ; Q210.2 69.682,85.786 69.113,85.217 69.113,81.534 ; 78.105,69.687 80.736,69.687 81.534,70.485 81.534,73.279 80.899,73.914 Q203.3 Q215.3 61.722,73.914 ; Q204.2 76.236,85.786 75.59,85.141 75.59,81.534 ; 86.979,81.534 Q202.3 75.59,81.534 ; 55.118,73.914 61.722,73.914 ; 62.662,81.534 Q214.3 69.113,81.534 ; 69.113,81.534 Q208.3 75.59,81.534
  Top Layer w1: C207.2 57.642,60.341 59.883,58.1 C205.1 62.545,58.1 63.26,58.815 U201.1 70.816,58.815 70.995,58.994 71.059,58.994 72.644,60.579 76.567,60.579 C208.2 ; v1(76.327,90.907) 77.673,89.56 82.169,89.56 88.02,83.709 C206.2 86.979,81.534 86.623,81.178 83.49,81.178 82.525,80.213 82.525,76.048 84.122,74.45 C200.2 83.792,73.787 81.661,73.787 81.661,69.977 80.899,69.215 78.105,69.215 C208.2 ; C209.1 79.676,62.117 C208.2
  Bottom Layer w0.5: 64.77,88.265 64.77,89.149 64.805,89.184 64.805,90.258 64.77,90.292 64.77,90.805
  Bottom Layer w0.6: C203.1 80.261,96.777 78.359,98.679 74.422,98.679 73.663,97.92 D200.1 73.663,96.263 75.946,93.98 75.946,91.882 C204.1 81.359,89.85 U200.4 ; C201.1 83.985,74.45 C200.2 85.311,74.45 86.172,75.311 R225.1 ; C206.2@89.154,83.627 C206.2
  Bottom Layer w1: P202.10 64.77,91.059 64.77,90.805 ; 64.77,88.265 65.786,87.249 74.93,87.249 76.327,88.646 v1(76.327,90.907)
Z_DR: P202.4
ZERRO_DR: P202.2

## Keep-outs
Keep-Out Layer:
  circle w0.254: c68.456,99.337 r3
  circle w0.254: c87.509,66.337 r3
  circle w0.254: c68.456,77.337 r25

## Silkscreen, mask and mechanical layers (free items; w line width, h text height)
Top Overlay:
  circle w0.254: c87.509,66.337 r3
  circle w0.254: c68.456,99.337 r3
  circle w0.254: c68.456,77.337 r25

## Text inside footprints (layer, text, board x,y; h text height)
C200: Top Overlay "+" at 83.705,81.675 h0.6 r270
C206: Top Overlay "+" at 88.404,88.684 h0.6 r270
C207: Top Overlay "+" at 52.667,61.988 h0.6
P200: Bottom Overlay "10" at 76.327,62.23 h0.6; Bottom Overlay "9" at 75.692,65.024 h0.6; Bottom Overlay "1" at 61.595,64.897 h0.6; Bottom Overlay "2" at 61.722,62.357 h0.6
P202: Bottom Overlay "10" at 62.103,92.329 h0.6; Bottom Overlay "9" at 61.976,88.9 h0.6; Bottom Overlay "1" at 75.743,89.23 h0.6; Bottom Overlay "2" at 75.946,92.329 h0.6